# Altium PCB V_12.PcbDoc
Units mm, origin at the board's own origin, x right, y up, seen from the top; angles counter-clockwise.
Board outline 70 x 20 mm, 2 copper layers (Top Layer, Bottom Layer); 6 components, 9 nets, 81 pads, 17 vias.
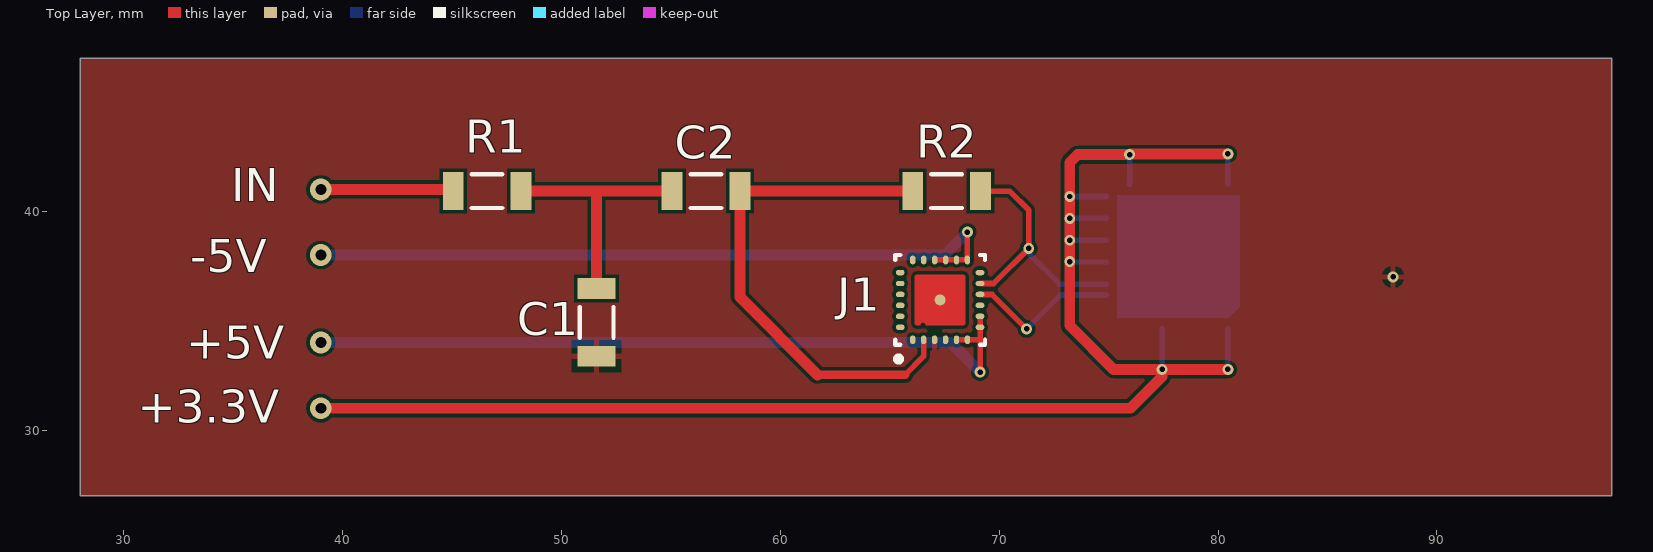
[diagram p0: Top Layer view]
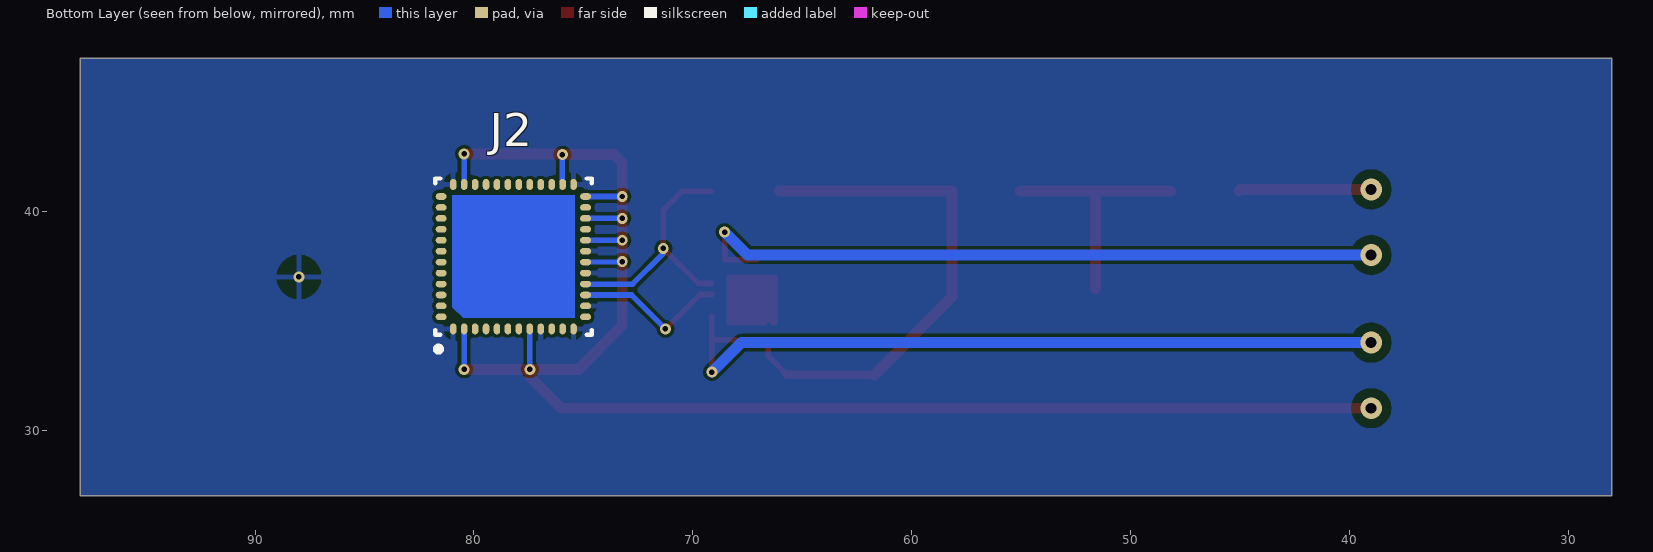
[diagram p1: Bottom Layer view, seen from below]

## Layer stack, top to bottom
Top Solder: solder mask 0.0102, Solder Resist, Dk 3.5
Top Layer: signal copper 0.0356
Dielectric 1: dielectric 0.32, FR-4, Dk 4.8
Bottom Layer: signal copper 0.0356
Bottom Solder: solder mask 0.0102, Solder Resist, Dk 3.5

## Board outline
28,27 98,27 98,47 28,47

## Design rules (kind name [scope] priority, off if disabled: settings)
Clearance [All] p1: gap=0.15 ignorepadtopadclearanceinfootprint=FALSE
PolygonConnect [All] p1: connectstyle=Relief reliefconductorwidth=0.254 reliefentries=4 polygonreliefangle="90 Angle" airgapwidth=0.254
RoutingVias [All] p1: holewidth=0.711 width=1.27 viastyle="Through Hole" minholewidth=0.711 minwidth=1.27 maxholewidth=0.711 maxwidth=1.27
SolderMaskExpansion [All] p1: expansion=0.102
Width [All] p1: maxlimit=3 minlimit=0.15 preferedwidth=0.5 minimp=50.000000 maximp=50.000000 favimp=50.000000
30 further rules are at their usual default settings.

## Components (designator, comment, footprint, x,y, rotation, side; value= is the part's Value field where it differs from the comment)
C1 "C" 1206 51.6,34.925 r90 top
C2 "C" 1206 56.6,40.925 r0 top
J1 "ADA4932-1" LFCSP_WQ 67.3,35.95 r90 top
J2 "ADS61B29" VQFN 78.2,37.925 r90 bottom
R1 "R" 1206 46.6,40.925 r0 top
R2 "R" 1206 67.6,40.925 r0 top

## Footprints (in the part's own frame and the unit in brackets; to place one, negate y for a bottom-side part, rotate by r counter-clockwise, add the part's x,y. Pads: shape width x height; smd on the part's side, far side on the other; paste and mask are expansions set on the pad)
1206 [mm] "Chip Capacitor, 2-Leads, Body 3,20x1,60mm, IPC Medium Density"
  rect 0.95x1.75 smd: 1(-1.55,0) 2(1.55,0)
  silkscreen extent -0.7,-0.77 0.7,0.77, body extent -1.6,-0.8 1.6,0.8, height 0.55
LFCSP_WQ [mm] "PQFN, 24-Leads, Body 4,00x4,00mm, Pitch 0,50mm, Thermal Pad 2,55x2,55mm, IPC Medium Density"
  oval 0.4x0.25 smd: 1(-1.825,1.25) 2(-1.825,0.75) 3(-1.825,0.25) 4(-1.825,-0.25) 5(-1.825,-0.75) 6(-1.825,-1.25) 13(1.825,-1.25) 14(1.825,-0.75) 15(1.825,-0.25) 16(1.825,0.25) 17(1.825,0.75) 18(1.825,1.25)
  oval 0.25x0.4 smd: 7(-1.25,-1.825) 8(-0.75,-1.825) 9(-0.25,-1.825) 10(0.25,-1.825) 11(0.75,-1.825) 12(1.25,-1.825) 19(1.25,1.825) 20(0.75,1.825) 21(0.25,1.825) 22(-0.25,1.825) 23(-0.75,1.825) 24(-1.25,1.825)
  round 0.5 smd: 49(0,0)
  Top Layer region: -1.154,-1.045 -1.154,0.655 -1.1,0.667 -1.056,0.702 -1.032,0.752 -1.032,0.808 -1.056,0.858 -1.1,0.893 -1.154,0.905 -1.154,0.905 -1.154,1.055 -1.146,1.093 -1.125,1.126 -1.092,1.147 -1.054,1.155 -1.054,1.155 1.046,1.155 1.084,1.147 1.117,1.126 1.138,1.093 1.146,1.055 1.146,1.055 1.146,-1.045 1.138,-1.083 1.117,-1.116 1.084,-1.137 1.046,-1.145 1.046,-1.145 -1.054,-1.145 -1.092,-1.137 -1.125,-1.116 -1.146,-1.083 -1.154,-1.045
  Top Layer pour cut-out: -1.524,-4.826
  Top Layer pour cut-out: -0.508,-4.572
  Top Layer pour cut-out: -3.81,0.889
  Top Layer region: -4.318,2.667
  silkscreen extent -2.82,-2.05 2.05,2.05, body extent -2.05,-2.05 2.05,2.05, height 0.75
VQFN [mm] "PQFN, 48-Leads, Body 7,00x7,00mm, Pitch 0,55mm, Thermal Pad 5,60x5,60mm, IPC Medium Density"
  oval 0.5x0.3 smd: 1(-3.3,2.75) 2(-3.3,2.25) 3(-3.3,1.75) 4(-3.3,1.25) 5(-3.3,0.75) 6(-3.3,0.25) 7(-3.3,-0.25) 8(-3.3,-0.75) 9(-3.3,-1.25) 10(-3.3,-1.75) 11(-3.3,-2.25) 12(-3.3,-2.75) 25(3.3,-2.75) 26(3.3,-2.25) 27(3.3,-1.75) 28(3.3,-1.25) 29(3.3,-0.75) 30(3.3,-0.25) 31(3.3,0.25) 32(3.3,0.75) 33(3.3,1.25) 34(3.3,1.75) 35(3.3,2.25) 36(3.3,2.75)
  oval 0.3x0.5 smd: 13(-2.75,-3.3) 14(-2.25,-3.3) 15(-1.75,-3.3) 16(-1.25,-3.3) 17(-0.75,-3.3) 18(-0.25,-3.3) 19(0.25,-3.3) 20(0.75,-3.3) 21(1.25,-3.3) 22(1.75,-3.3) 23(2.25,-3.3) 24(2.75,-3.3) 37(2.75,3.3) 38(2.25,3.3) 39(1.75,3.3) 40(1.25,3.3) 41(0.75,3.3) 42(0.25,3.3) 43(-0.25,3.3) 44(-0.75,3.3) 45(-1.25,3.3) 46(-1.75,3.3) 47(-2.25,3.3) 48(-2.75,3.3)
  Top Layer region: -2.796,-2.805 -2.801,2.3 -2.304,2.799 2.804,2.801 2.81,-2.8
  silkscreen extent -4.35,-3.57 3.57,3.58, body extent -3.58,-3.57 3.57,3.58, height 1

## Via types
v1: diameter 0.5, hole 0.25, Top Layer to Bottom Layer, 13 vias
v2: diameter 1, hole 0.5, Top Layer to Bottom Layer, 4 vias

## Nets (pads, with @x,y where several pads share a name; then routed paths per layer and width w, separated by ;. In a path a pad name is that pad's centre, name@x,y a point inside that pad or via, vN(x,y) a via of type N, cw(c..) or ccw(c..) an arc to the next point about the centre after c; other vN are vias at no path point)
+3.3V: J2.2 J2.8 J2.18 J2.20 J2.22 J2.24 J2.26 J2.35 | length 75.4
  Top Layer w0.5: v2(39,31) 76,31 77.45,32.45 v1(77.45,32.775) ; v1(80.45,32.775) v1(77.45,32.775) ; v1(80.45,42.625) 80.433,42.608 75.976,42.608 v1(75.959,42.59) 73.59,42.59 73.225,42.225 v1(73.225,40.675) v1(73.225,39.675) v1(73.225,38.675) v1(73.225,37.7) 73.225,34.775 75.225,32.775 v1(77.45,32.775)
  Bottom Layer w0.254: v1(73.225,37.7) J2.18 ; v1(73.225,38.675) J2.20 ; v1(73.225,39.675) J2.22 ; v1(73.225,40.675) J2.24 ; J2.26 75.959,41.234 v1(75.959,42.59) ; v1(77.45,32.775) J2.8 ; v1(80.45,32.775) J2.2 ; J2.35 v1(80.45,42.625)
+5V: J1.5 J1.6 J1.7 J1.8 | length 34.3
  Top Layer w0.254: J1.5 J1.6 69.125,34.125 ; v1(69.125,32.65) 69.125,34.125 ; J1.8 J1.7 69.125,34.125
  Bottom Layer w0.5: v2(39,34) 67.775,34 v1(69.125,32.65)
-5V: J1.13 J1.14 J1.15 J1.16 | length 32.8
  Top Layer w0.254: J1.16 J1.15 J1.14 J1.13 v1(68.55,39.05)
  Bottom Layer w0.5: v2(39,38) 67.5,38 v1(68.55,39.05)
GND: C1.1 J1.3 J2.1 J2.9 J2.12 J2.14 J2.17 J2.19 J2.25 J2.36
  other v1: 88,37
NetC1_2: C1.2 C2.1 R1.2 | length 11.4
  Top Layer w0.5: R1.2 51.6,40.925 ; C1.2 51.6,40.925 ; C2.1 51.6,40.925
NetC2_2: C2.2 J1.2 R2.1 | length 23.7
  Top Layer w0.254: 65.7,32.525 66.55,33.375 J1.2
  Top Layer w0.4: 61.7,32.525 65.7,32.525
  Top Layer w0.5: 61.7,32.525 58.15,36.075 C2.2 R2.1
NetJ1_10: J1.10 J2.15 | length 7.1
  Top Layer w0.254: J1.10 69.127,36.198 69.677,36.198 v1(71.25,34.625)
  Bottom Layer w0.254: v1(71.25,34.625) 72.8,36.175 J2.15
NetJ1_11: J1.11 J2.16 R2.2 | length 11.6
  Top Layer w0.254: J1.11 69.75,36.7 v1(71.35,38.3) 71.35,40.05 70.475,40.925 R2.2
  Bottom Layer w0.254: v1(71.35,38.3) 71.35,38.075 72.75,36.675 J2.16
NetR1_1: R1.1 | length 6.1
  Top Layer w0.5: v2(39,41) 44.975,41 R1.1
pads on no net: J1.1 J1.4 J1.9 J1.12 J1.17 J1.18 J1.19 J1.20 J1.21 J1.22 J1.23 J1.24 J1.49 J2.3 J2.4 J2.5 J2.6 J2.7 J2.10 J2.11 J2.13 J2.21 J2.23 J2.27 J2.28 J2.29 J2.30 J2.31 J2.32 J2.33 J2.34 J2.37 J2.38 J2.39 J2.40 J2.41 J2.42 J2.43 J2.44 J2.45 J2.46 J2.47 J2.48

## Polygon pours and split planes (outlines as drawn)
GND on Top Layer "Top Layer-GND" (solid, pour order 32): 28,27 28,47 98,47 98,27
GND on Top Layer "Top Layer-GND 1" (solid, pour order 30): 28,47
no net on Top Layer "NONET_L01_P006" (solid, shelved, pour order 6): 35.999,36.97
no net on Top Layer "NONET_L01_P004" (solid, shelved, pour order 4): 33.699,38.12
GND on Bottom Layer "Bottom Layer-GND" (solid, pour order 28): 28,47 28,27 98,27 98,47

## Silkscreen, mask and mechanical layers (free items; w line width, h text height)
Top Overlay:
  text "IN" at 34.9,40.45 h1.52
  text "-5V" at 33.025,37.225 h1.52
  text "+5V" at 32.85,33.25 h1.52
  text "+3.3V" at 30.625,30.325 h1.52
Mechanical 13:
  the board outline again, w0.01